# EAGLE board i2s-shifter_rev2-non_plated (EAGLE 7.3.0)
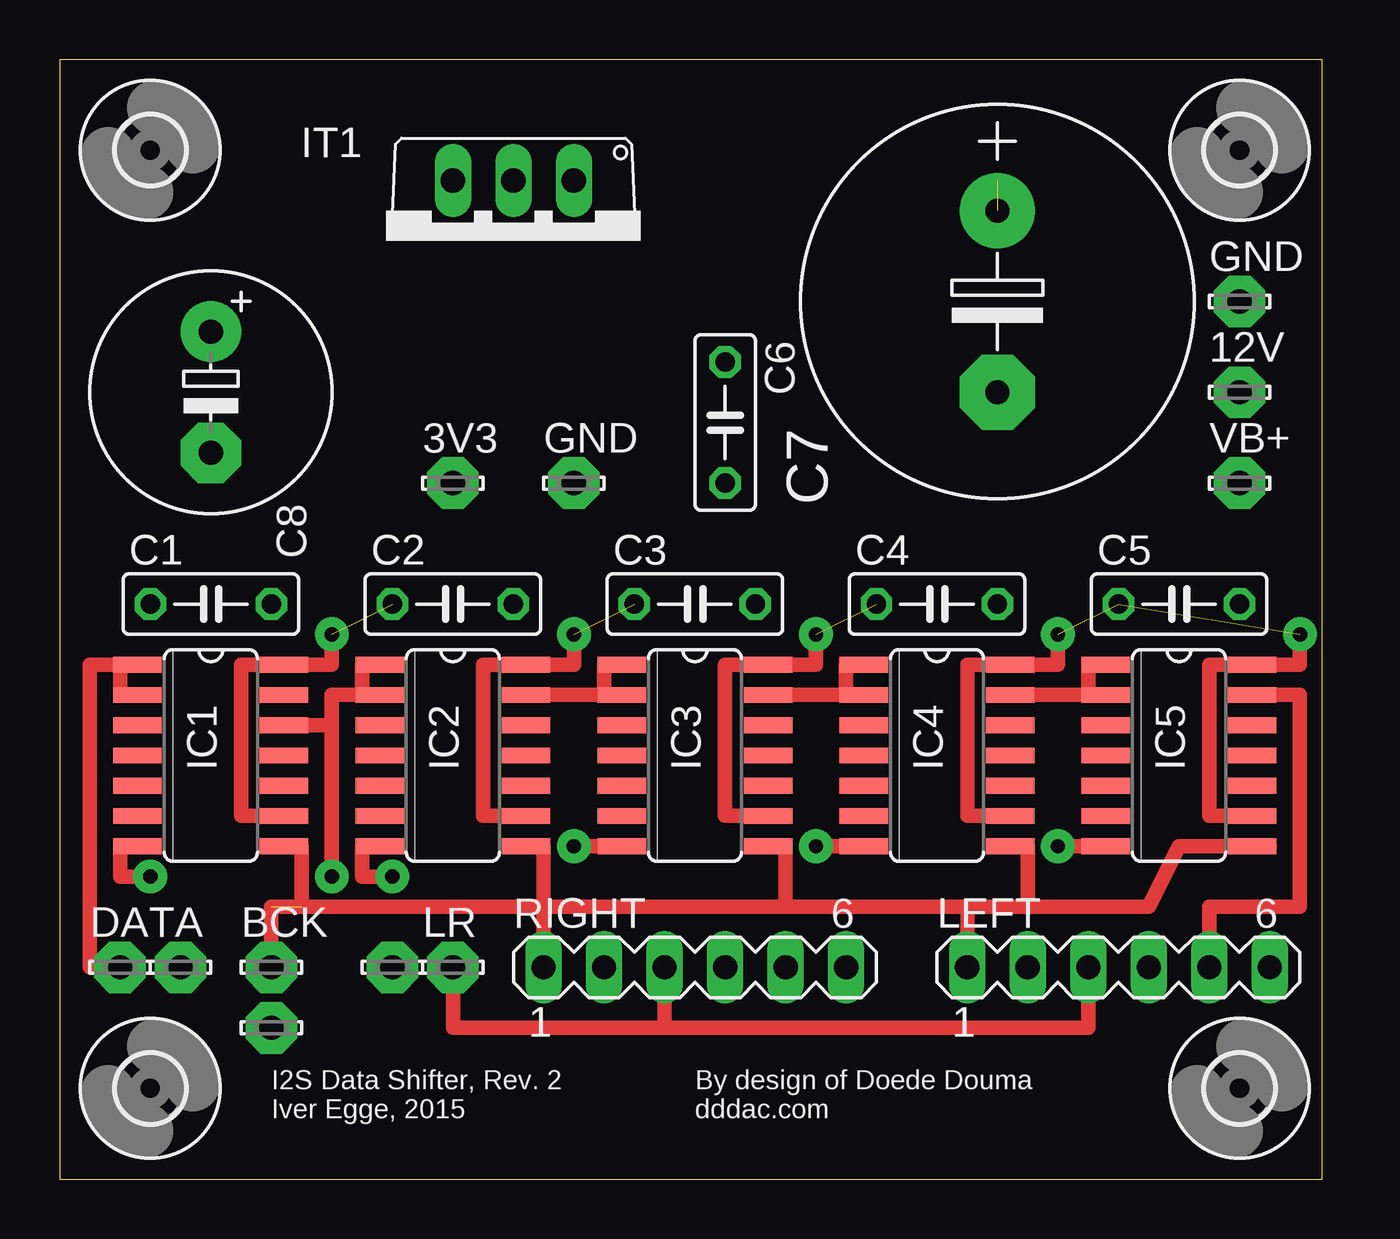
[diagram p0: board, top side]
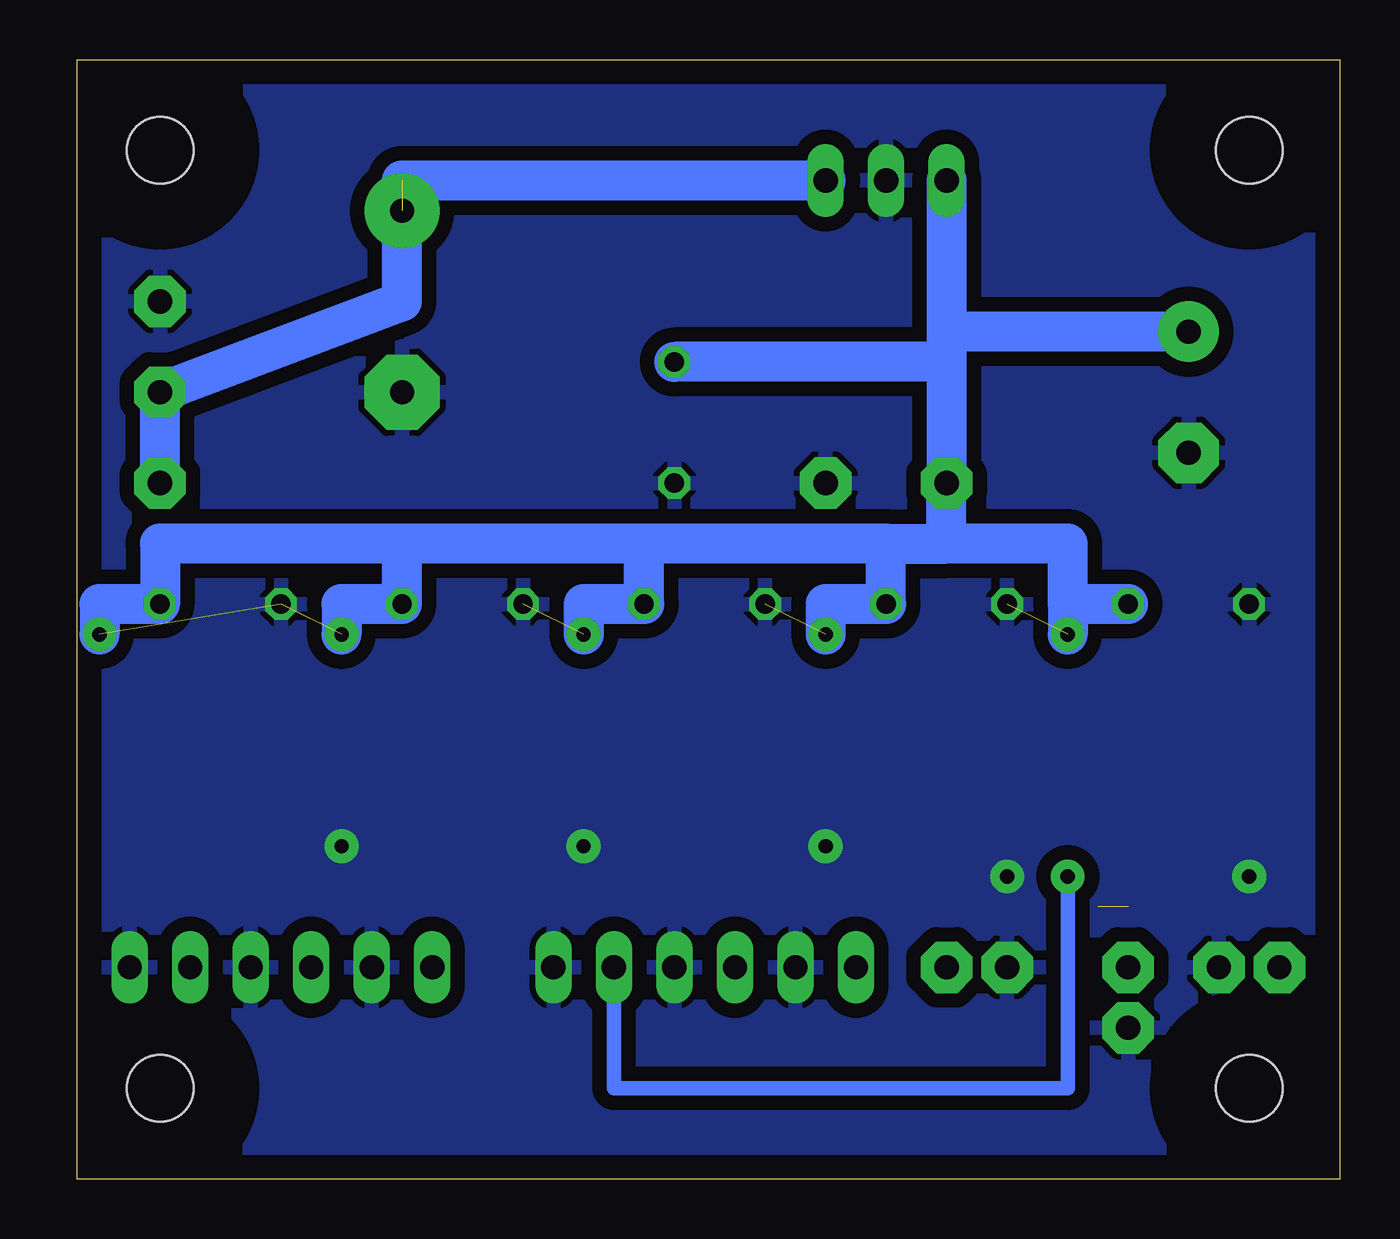
[diagram p1: board, bottom side, seen from below]

Size 53.01 x 46.98 mm. Coordinates in mm from the lower left corner, seen from the top.
Outline: 0,0 53.01,0 53.01,46.98 0,46.98 0,0
Copper layers (1*16): Top 0.035mm / dielectric 1.5mm / Bottom 0.035mm
Design rules "default": minimum track width 10mil, minimum drill 24mil, track to track 8mil, track to pad 8mil, pad to pad 8mil, via to via 8mil, smd to smd 8mil, copper to edge 40mil, drill to drill 8mil, minimum pad ring 10mil, minimum via ring 8mil, stop-mask expansion 4mil, vias tented up to drill 0mil, thermal gap 10mil

## Footprints (pad centres in the part's own frame; a part is rotated, then mirrored left to right if it is on the bottom)
LSP10 = drill 1.016 pad 2.159 octagon: MP 0,0
C050-025X075 = drill 0.813 octagon: 1 -2.54,0; 2 2.54,0
E7,5-16 = drill 1.016 pad 3.15: + -3.81,0 | drill 1.016 pad 3.15 octagon: - 3.81,0
E5-10,5 = drill 1.016 pad 2.54: + -2.54,0 | drill 1.016 pad 2.54 octagon: - 2.54,0
SO14 = smd 0.66 x 2.032: 1 -3.81,-3.073; 2 -2.54,-3.073; 3 -1.27,-3.073; 4 0,-3.073; 5 1.27,-3.073; 6 2.54,-3.073; 7 3.81,-3.073; 8 3.81,3.073; 9 2.54,3.073; 10 1.27,3.073; 11 0,3.073; 12 -1.27,3.073; 13 -2.54,3.073; 14 -3.81,3.073
TO220V = drill 1.016 long: 1 -2.54,-2.54; 2 0,-2.54; 3 2.54,-2.54
MA06-1 = drill 1.016 long: 1 -6.35,0; 2 -3.81,0; 3 -1.27,0; 4 1.27,0; 5 3.81,0; 6 6.35,0
2,8 = hole 2.8: 0,0

## Placement (x,y rotation side)
3V3  LSP10  [LSP10]  16.51,29.21 0 top
12V  LSP10  [LSP10]  49.53,33.02 0 top
BCK  LSP10  [LSP10]  8.89,8.89 0 top
C1  [C050-025X075]  6.35,24.13 0 top
C2  [C050-025X075]  16.51,24.13 0 top
C3  [C050-025X075]  26.67,24.13 0 top
C4  [C050-025X075]  36.83,24.13 0 top
C5  [C050-025X075]  46.99,24.13 0 top
C6  [C050-025X075]  27.94,31.75 270 top
C7  [E7,5-16]  39.37,36.83 270 top
C8  [E5-10,5]  6.35,33.02 270 top
DATA  LSP10  [LSP10]  2.54,8.89 0 top
GND  LSP10  [LSP10]  49.53,36.83 0 top
GND15  LSP10  [LSP10]  13.97,8.89 0 top
GND16  LSP10  [LSP10]  8.89,6.35 0 top
GND17  LSP10  [LSP10]  5.08,8.89 0 top
GND*  LSP10  [LSP10]  21.59,29.21 0 top
IC1  74HC164D  [SO14]  6.35,17.78 270 top
IC2  74HC164D  [SO14]  16.51,17.78 270 top
IC3  74HC164D  [SO14]  26.67,17.78 270 top
IC4  74HC164D  [SO14]  36.83,17.78 270 top
IC5  74HC164D  [SO14]  46.99,17.78 270 top
IT1  LM3940IT-3.3  [TO220V]  19.05,39.37 180 top
LEFT  [MA06-1]  44.45,8.89 0 top
LR  LSP10  [LSP10]  16.51,8.89 0 top
RIGHT  [MA06-1]  26.67,8.89 0 top
U$1  [2,8]  3.81,43.18 0 top
U$2  [2,8]  49.53,43.18 0 top
U$3  [2,8]  49.53,3.81 0 top
U$4  [2,8]  3.81,3.81 0 top
VB+  LSP10  [LSP10]  49.53,29.21 0 top

## Library data of the parts
3V3 12V BCK DATA GND GND15-GND17 GND* LR VB+ = solpad
C1-C8 = resistor
IC1-IC5 = 74xx-eu
IT1 = LM3940
LEFT RIGHT = con-lstb; OC_FARNELL: unknown; OC_NEWARK: unknown
U$1-U$4 = holes

## Nets
+3V3: 3V3.MP C1.2 C2.2 C3.2 C4.2 C5.2 C6.1 C8.+ IC1.9 IC1.14 IC2.9 IC2.14 IC3.9 IC3.14 IC4.9 IC4.14 IC5.9 IC5.14 IT1.3
+12V: 12V.MP C7.+ IT1.1 VB+.MP
GND: C1.1 C2.1 C3.1 C4.1 C5.1 C6.2 C7.- C8.- GND15.MP GND16.MP GND17.MP GND*.MP GND.MP IC1.7 IC2.7 IC3.7 IC4.7 IC5.7 IT1.2 LEFT.2 LEFT.4 LEFT.6 RIGHT.2 RIGHT.4 RIGHT.6
N$1: DATA.MP IC1.1 IC1.2
N$2: BCK.MP IC1.8 IC2.8 IC3.8 IC4.8 IC5.8 LEFT.1 RIGHT.1
N$3: IC1.12 IC2.1 IC2.2 RIGHT.5
N$4: IC2.13 IC3.1 IC3.2
N$5: IC3.13 IC4.1 IC4.2
N$6: IC4.13 IC5.1 IC5.2
N$7: LEFT.3 LR.MP RIGHT.3
N$8: IC5.13 LEFT.5

## Tracks (layer width: path | path; a pad name or v marks a point on that pad's centre or on a via)
+3V3  (5 unrouted)
  Top 0.61: IC3.9 27.94,15.24 27.94,21.59 IC3.14 31.75,21.59 31.75,22.86 | IC4.9 38.1,15.24 38.1,21.59 IC4.14 41.91,21.59 41.91,22.86 | IC5.9 48.26,15.24 48.26,21.59 IC5.14 52.07,21.59 52.07,22.86 | IC2.9 17.78,15.24 17.78,21.59 IC2.14 21.59,21.59 21.59,22.86 | IC1.9 7.62,15.24 7.62,21.59 IC1.14 11.43,21.59 11.43,22.86
  Bottom 1.676: C1.2 11.43,24.13 | 11.43,24.13 11.43,26.67 16.51,26.67 | 19.05,26.67 29.21,26.67 | 29.21,26.67 39.37,26.67 | 39.37,26.67 49.53,26.67 C5.2 52.07,24.13 52.07,22.86 | 39.37,26.67 C4.2 41.91,24.13 41.91,22.86 | 29.21,26.67 C3.2 31.75,24.13 31.75,22.86 | 19.05,26.67 C2.2 21.59,24.13 21.59,22.86 | 11.43,24.13 11.43,22.86 | 19.05,26.67 16.51,26.67 | 16.51,26.67 3V3.MP 16.51,34.29 | 16.51,34.29 C6.1 | IT1.3 16.51,35.56 | 16.51,35.56 16.51,34.29 | C8.+ 16.51,35.56
+12V  (1 unrouted)
  Bottom 1.676: VB+.MP 12V.MP 39.37,36.83 39.37,41.91 IT1.1
GND  (via drill 0.6 pad 1.42)  (5 unrouted)
  Top 0.406: v21.59,13.97 22.86,13.97 | 2.54,13.97 IC1.7 3.81,13.97 | 12.7,13.97 IC2.7
  Top 0.61: v31.75,13.97 IC4.7 | v3.81,12.7 2.54,12.7 2.54,13.97 | v13.97,12.7 12.7,12.7 12.7,13.97 | v21.59,13.97 IC3.7 | IC5.7 v41.91,13.97
  other vias: 11.43,22.86 21.59,22.86 31.75,22.86 41.91,22.86 52.07,22.86
  pour Bottom (isolate 0.61): 0,0 53.34,0 53.34,46.99 0,46.99
N$1
  Top 0.406: 2.54,21.59 IC1.1 | IC1.2 2.54,20.32
  Top 0.61: DATA.MP 1.27,8.89 1.27,21.59 2.54,21.59 2.54,20.32
N$2  (1 unrouted)
  Top 0.254: 30.48,13.97 IC3.8 | 50.8,13.97 IC5.8
  Top 0.406: IC4.8 40.64,13.97 | 10.16,13.97 IC1.8 | IC2.8 20.32,13.97
  Top 0.61: 20.32,11.43 30.48,11.43 | 30.48,11.43 38.1,11.43 | 40.64,13.97 40.64,11.43 | 20.32,11.43 8.89,11.43 BCK.MP | 10.16,11.43 10.16,13.97 | 20.32,13.97 20.32,11.43 | 30.48,11.43 30.48,13.97 | 40.64,11.43 45.72,11.43 46.99,13.97 50.8,13.97 | RIGHT.1 20.32,11.43 | 40.64,11.43 38.1,11.43 | 38.1,11.43 LEFT.1
N$3  (via drill 0.6 pad 1.42)
  Top 0.406: IC2.2 12.7,20.32 | IC2.1 12.7,21.59
  Top 0.61: 11.43,19.05 11.43,20.32 12.7,20.32 12.7,21.59 | 11.43,19.05 v11.43,12.7 | IC1.12 11.43,19.05
  Bottom 0.61: v11.43,12.7 11.43,3.81 30.48,3.81 RIGHT.5
N$4
  Top 0.406: IC3.2 22.86,20.32 | 22.86,21.59 IC3.1
  Top 0.61: IC2.13 22.86,20.32 22.86,21.59
N$5
  Top 0.406: IC4.2 33.02,20.32 | IC4.1 33.02,21.59
  Top 0.61: IC4.2 IC3.13 | 33.02,20.32 33.02,21.59
N$6
  Top 0.406: 43.18,20.32 IC5.2 | IC5.1 43.18,21.59
  Top 0.61: IC4.13 43.18,20.32 43.18,21.59
N$7
  Top 0.61: LR.MP 16.51,6.35 25.4,6.35 | 25.4,6.35 43.18,6.35 LEFT.3 | RIGHT.3 25.4,6.35
N$8
  Top 0.61: IC5.13 52.07,20.32 52.07,11.43 48.26,11.43 LEFT.5

## Text on the board
tPlace: I2S Data Shifter, Rev. 2 / Iver Egge, 2015 | By design of Doede Douma / dddac.com
tNames: GND